# Altium PCB wch554g.PcbDoc
Units mm, origin at the board's own origin, x right, y up, seen from the top; angles counter-clockwise.
Board outline 17.6 x 16 mm, 2 copper layers (Top Layer, Bottom Layer), stack 0.75 mm thick; 18 components, 15 nets, 55 pads, 10 vias.
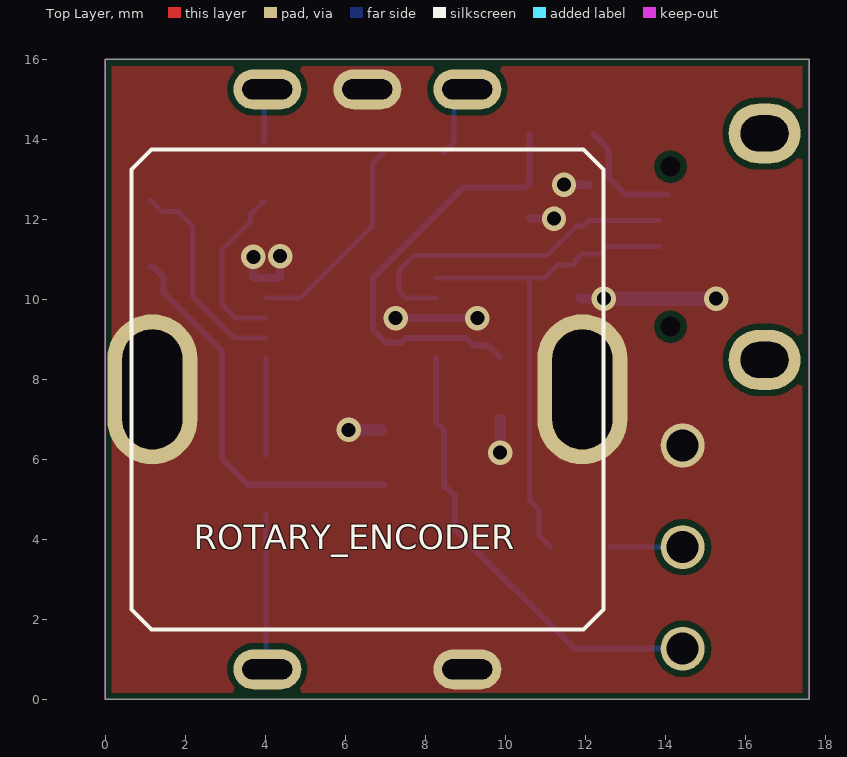
[diagram p0: Top Layer view]
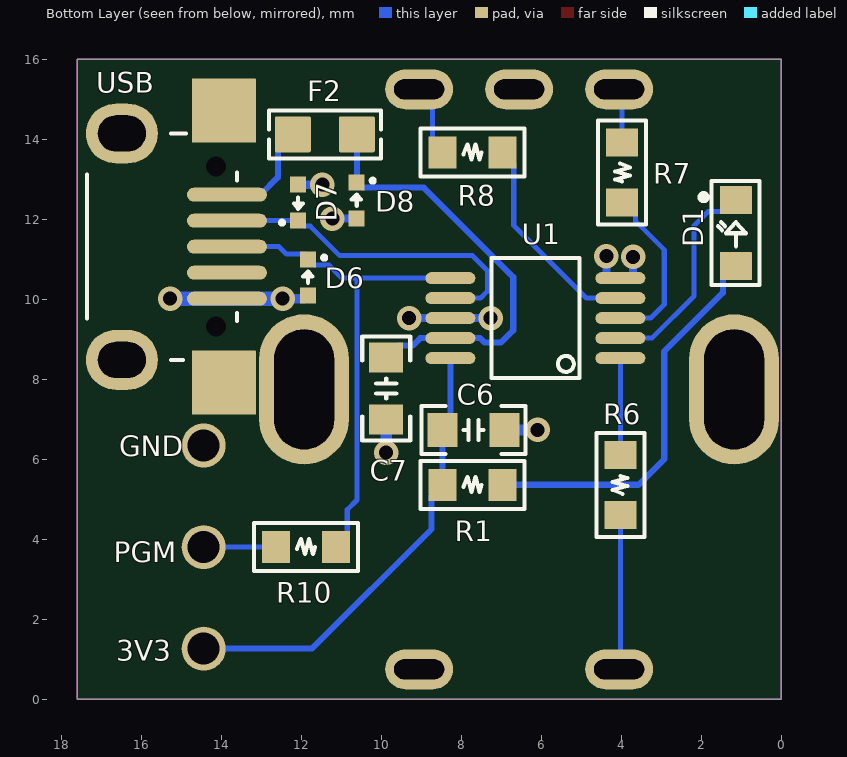
[diagram p1: Bottom Layer view, seen from below]
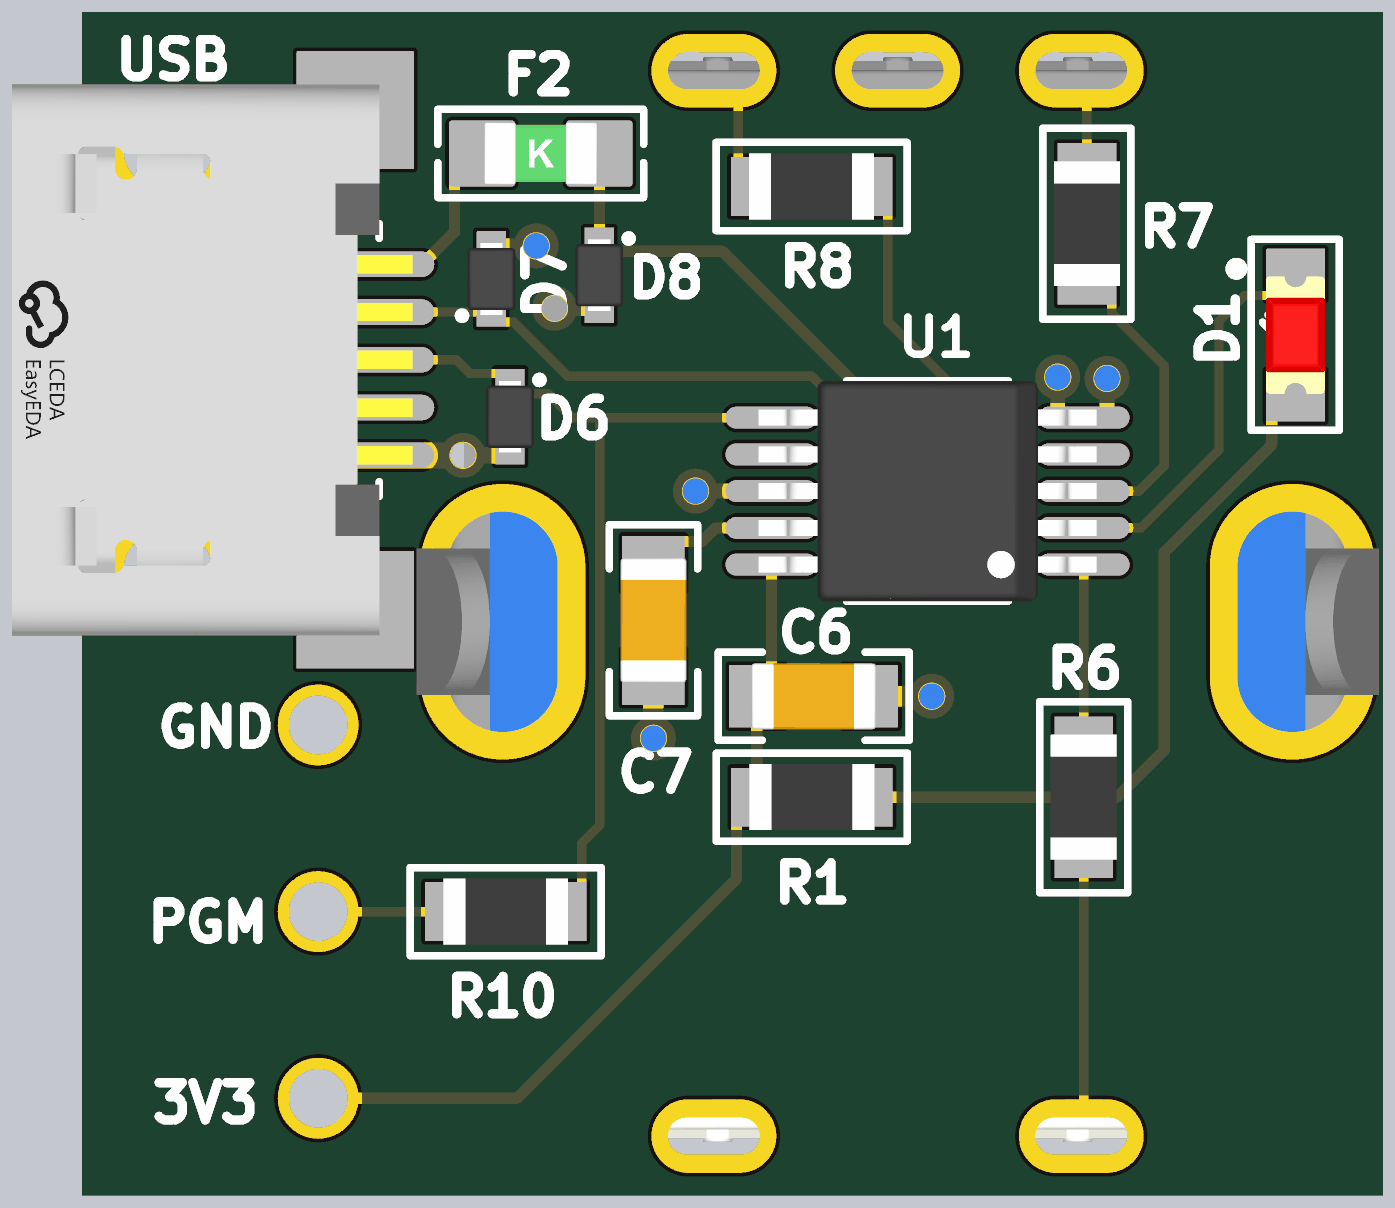
[diagram p2: 3D render of the assembled board from below, using the file's embedded part models]

## Layer stack, top to bottom
Top Solder: solder mask 0.0254, SM-001, Dk 4
Top Layer: signal copper 0.035
Dielectric 1: core 0.68, Core-043, Dk 4.3
Bottom Layer: signal copper 0.035
Bottom Solder: solder mask 0.0254, SM-001, Dk 4

## Board outline
17.6,0 0,0 0,16 17.6,16

## Design rules (kind name [scope] priority, off if disabled: settings)
BoardOutlineClearance [(OnLayer('Top Layer') AND OnLayer('Bottom Layer'))] p1: gap=0.005 ignorepadtopadclearanceinfootprint=FALSE
Clearance [All] p1: gap=0.152 ignorepadtopadclearanceinfootprint=FALSE
ComponentClearance [All] p1: gap=0 collisioncheckmode=3 verticalgap=0.254 showdistances=FALSE
DiffPairsRouting [All] p1: maxlimit=0.254 minlimit=0.102 mostfreqgap=0.254 toplayer_minwidth=0.102 toplayer_maxwidth=0.762 toplayer_prefwidth=0.102 bottomlayer_minwidth=0.102 bottomlayer_maxwidth=0.762 bottomlayer_prefwidth=0.102 maxuncoupledlength=25.4
Height [All] p1: minheight=0 maxheight=100 prefheight=12.7
HoleSize [All] p1: absolutevalues=TRUE maxlimit=10 minlimit=0.3 maxpercent=80.000 minpercent=20.000
MinimumSolderMaskSliver [All] p1: minsoldermaskwidth=0.099
PolygonConnect PolygonConnect_GND [(InNet('GND')) AND (IsVia OR (AsMM(PadXSize_AllLayers) >= 1) OR (AsMM(PadYSize_AllLayers) >= 1))] p1: connectstyle=Direct reliefconductorwidth=0.254 reliefentries=4 polygonreliefangle="90 Angle" airgapwidth=0.254
PolygonConnect [All] p2: connectstyle=Relief reliefconductorwidth=0.152 reliefentries=4 polygonreliefangle="90 Angle" airgapwidth=0.152
RoutingVias [All] p1: holewidth=0.711 width=1.27 viastyle="Through Hole" minholewidth=0.711 minwidth=1.27 maxholewidth=0.711 maxwidth=1.27 useviatemplates=TRUE viatemplateguid#1={36E6A619-BCA5-4D4E-B353-D9B316F3DFD6} viatemplatename#1=GND_VIA
SilkToSilkClearance [All] p1: silktosilkclearance=0
SilkToSolderMaskClearance [False vs False] p1: minsilkscreentomaskgap=0.254 clearancetoexposedcopper=TRUE
SolderMaskExpansion [All] p1: expansion=0.05 istentingtop=FALSE
Width [All] p1: maxlimit=0.762 minlimit=0.102 preferedwidth=0.127 minimp=50.000000 maximp=50.000000 favimp=50.000000
23 further rules are at their usual default settings.

## Classes and differential pairs
differential pair USB_D: +USB_D_P -USB_D_N

## Components (designator, comment, footprint, x,y, rotation, side; value= is the part's Value field where it differs from the comment)
3V3 "CON2" CON2 14.44,1.27 r270 bottom
C6 "1uF" MLCC_0603 7.696,6.741 r0 bottom
C7 "1uF" MLCC_0603 9.876,7.775 r90 bottom
D1 "20mA" SMT_LED_0603 1.143,11.659 r270 bottom
D6 "TVS_DIODE" TVS_DIODE 11.828,10.546 r270 bottom
D7 "TVS_DIODE" TVS_DIODE 12.082,12.42 r90 bottom
D8 "TVS_DIODE" TVS_DIODE 10.614,12.471 r270 bottom
F2 "1A" "FUSE 0603" 11.411,14.129 r180 bottom
GND "CON2" CON2 14.44,6.35 r90 bottom
PGM "CON2" CON2 14.44,3.81 r90 bottom
R1 "680r" SMT_RES_0603 7.721,5.368 r180 bottom
R6 "220r" SMT_RES_0603 4.021,5.368 r90 bottom
R7 "220r" SMT_RES_0603 3.978,13.171 r270 bottom
R8 "220r" SMT_RES_0603 7.725,13.679 r180 bottom
R10 "10k" SMT_RES_0603 11.887,3.81 r180 bottom
ROTARY_ENCODER "ROTARY_ENCODER" ENCODER 6.554,7.755 r180 top
U1 "CH554E" MSOP10 6.146,9.533 r90 bottom
USB "USB Micro" "USB MICRO B" 15.16,11.32 r270 bottom

## Footprints (in the part's own frame and the unit in brackets; to place one, negate y for a bottom-side part, rotate by r counter-clockwise, add the part's x,y. Pads: shape width x height; smd on the part's side, far side on the other; paste and mask are expansions set on the pad)
CON2 [mm] "Debug header"
  rrect100% 1.1x1.1 hole 0.8: 1(0,0)
ENCODER [mm] "Rotary encoder"
  oval 1.7x1 hole 0.5 slot 1.25 at 0 deg: 1(-2.5,-7.5) 2(0,-7.5) 3(2.5,-7.5) 4(-2.5,7) 5(2.5,7)
  rrect100% 2.25x3.75 hole 1.5 slot 3 at 90 deg: 2(-5.375,0)
  oval 2.25x3.75 hole 1.5 slot 3 at 90 deg: 2(5.375,0)
  silkscreen extent -5.9,-6 5.9,6, body extent -6.55,-7.68 6.55,7.08, height 21.18
"FUSE 0603" [mm] "Chip Fuse 1A"
  rrect10% 0.9x0.9 smd: 1(-0.8,0) 2(0.8,0)
  silkscreen extent -1.4,-0.6 1.4,0.6, body extent -0.77,-0.42 0.77,0.43, height 0.58
MLCC_0603 [mm] "MLCC 0603"
  rrect1% 0.75x0.85 smd: 1(-0.775,0) 2(0.775,0)
  silkscreen extent -1.3,-0.6 1.3,0.6, body extent -0.85,-0.45 0.85,0.45, height 0.7
MSOP10 [mm] "MSOP10 3x3 x 0.5"
  oval 0.3x1.25 smd: 1(-1,-2.125) 2(-0.5,-2.125) 3(0,-2.125) 4(0.5,-2.125) 5(1,-2.125) 6(1,2.125) 7(0.5,2.125) 8(0,2.125) 9(-0.5,2.125) 10(-1,2.125)
  silkscreen extent -1.5,-1.1 1.5,1.1, body extent -1.5,-2.3 1.5,2.3, height 1
SMT_LED_0603 [mm] "SMT LED 0603"
  rrect1% 0.7x0.8 smd: 1(-0.823,0.005) 2(0.827,0.005)
  silkscreen extent -1.3,-0.85 1.3,0.6, body extent -0.8,-0.39 0.8,0.41, height 0.8
SMT_RES_0603 [mm] "0603 SMT Resistor"
  rrect1% 0.7x0.8 smd: 1(-0.75,0) 2(0.75,0)
  silkscreen extent -1.3,-0.6 1.3,0.6, body extent -0.85,-0.45 0.85,0.45, height 0.5
TVS_DIODE [mm] "SODFL 98x40 2 pin"
  rrect1% 0.4x0.4 smd: 1(-0.45,0) 2(0.45,0)
  silkscreen extent -0.55,-0.13 0.13,0.45, body extent -0.49,-0.33 0.49,0.33, height 0.4
"USB MICRO B" [mm] "USB Micro B Receptacle"
  rrect100% 0.35x2 smd: 1(-1.3,1.3) 2(-0.65,1.3) 3(0,1.3) 4(0.65,1.3) 5(1.3,1.3)
  oval 0x0.5 hole 0.5 unplated paste-2539.97 mask+0: B(-2,1.025) B(2,1.025)
  rrect1% 1.6x1.6 smd: S(-3.4,1.225) S(3.4,1.225)
  oval 1.5x1.8 hole 0.9 slot 1.2 at 90 deg: S(-2.83,-1.325) S(2.83,-1.325)
  silkscreen extent -2.83,-2.2 2.83,1.55, body extent -3.75,-3.45 3.75,2, height 2.65

## Part data
C6 C7: library part CAP_CERAMIC, "MLCC", JLCPCB Part #=C29936
D1: library part LED, "LED", JLCPCB Part #=C205445
D6 D7 D8: "TVS Diode", JLCPCB Part #=C151980
F2: library part FUSE, "Resettable fuse", JLCPCB Part #=C210357
R1: library part RESISTOR, "Resistor", JLCPCB Part #=C23228
R6 R7 R8: library part RESISTOR, "Resistor", JLCPCB Part #=C27592
R10: library part RESISTOR, "Resistor", JLCPCB Part #=C25804
ROTARY_ENCODER: "Rotary Encoder"
U1: JLCPCB Part #=C111293
USB: library part USB_SOCKET, "USB Receptacle", JLCPCB Part #=C397452

## Via types
v1: diameter 0.61, hole 0.35, Top Layer to Bottom Layer, tented both sides, 10 vias

## Nets (pads, with @x,y where several pads share a name; then routed paths per layer and width w, separated by ;. In a path a pad name is that pad's centre, name@x,y a point inside that pad or via, vN(x,y) a via of type N, cw(c..) or ccw(c..) an arc to the next point about the centre after c; other vN are vias at no path point)
3v3: 3V3.1 C6.2 R1.1 U1.10 | length 11.5
  Bottom Layer w0.152: U1.10 8.271,6.891 8.321,6.891 C6.2 R1.1@8.471,5.318 ; R1.1 8.745,5.094 8.745,4.26 11.735,1.27 3V3.1
BUTTON: R6.2 U1.1 | length 2.4
  Bottom Layer w0.127: R6.2 U1.1
CHA: R8.2 U1.4 | length 5.4
  Bottom Layer w0.127: U1.4 4.872,10.033 6.688,11.85 6.688,13.392 R8.2
CHB: R7.2 U1.3 | length 4.2
  Bottom Layer w0.127: R7.2 3.928,12.421 3.641,12.135 3.641,11.958 2.925,11.242 2.925,9.875 3.268,9.533 U1.3
GND: C6.1 C7.1 D6.2 D7.2 D8.2 GND.1 ROTARY_ENCODER.2 ROTARY_ENCODER.4 U1.5 U1.8 USB.5 | length 10.1
  Bottom Layer w0.203: v1(3.704,11.067) 3.704,10.578 3.749,10.533 4.33,10.533 4.374,10.578 v1(4.374,11.085) ; v1(7.265,9.533) v1(9.305,9.533) ; D8.2 v1(11.222,12.021) ; v1(11.472,12.87) D7.2
  Bottom Layer w0.229: D6.2@11.867,10.058 11.905,10.02 v1(12.468,10.02)
  Bottom Layer w0.279: v1(6.089,6.741) C6.1 ; v1(9.876,6.169) C7.1
  Bottom Layer w0.356: v1(12.468,10.02) v1(15.277,10.02)
LED_A: D1.2 R1.2 | length 9.9
  Bottom Layer w0.152: D1.2 1.188,10.832 1.462,10.558 1.462,10.169 2.925,8.705 2.925,6.009 3.567,5.368 R1.2
LED_C: D1.1 U1.2 | length 5.3
  Bottom Layer w0.127: D1.1 1.424,12.195 1.832,12.195 2.179,11.848 2.179,10.09 3.236,9.033 U1.2
PGM: PGM.1 R10.1 | length 1.8
  Bottom Layer w0.127: R10.1 PGM.1
RTA: R8.1 ROTARY_ENCODER.1 | length 1.8
  Bottom Layer w0.127: R8.1 8.721,13.925 8.721,14.922 ROTARY_ENCODER.1
RTB: R7.1 ROTARY_ENCODER.3 | length 1.4
  Bottom Layer w0.127: R7.1 3.978,15.179 ROTARY_ENCODER.3
SWB: R6.1 ROTARY_ENCODER.5 | length 3.9
  Bottom Layer w0.127: R6.1 4.021,0.788 ROTARY_ENCODER.5
USB_D_N: D7.1 U1.7 USB.2 | length 8.5
  Bottom Layer w0.127: U1.7 7.522,10.033 7.349,10.207 7.349,10.725 7.718,11.095 11.036,11.095 11.775,11.834 11.946,11.834 D7.1 USB.2
USB_D_P: D6.1 R10.2 U1.6 USB.3 | length 12.9
  Bottom Layer w0.127: U1.6 10.606,10.533 ; R10.2 10.851,4.097 10.851,4.744 10.606,4.989 10.606,10.533 ; D6.1@11.772,10.996 11.909,11.133 12.37,11.133 12.557,11.32 USB.3 ; D6.1 11.692,10.86 11.311,10.86 10.985,10.533 10.606,10.533
VIN: F2.1 USB.1 | length 2.9
  Bottom Layer w0.152: F2.1 12.584,13.756 12.584,13.055 13.02,12.62 USB.1@14.063,12.62
VUSB: C7.2 D8.1 F2.2 U1.9 | length 11
  Bottom Layer w0.152: C7.2 9.578,8.849 9.215,8.849 9.031,9.033 U1.9 7.529,9.033 7.422,8.926 7.004,8.926 6.702,9.229 6.702,10.559 8.94,12.797 10.491,12.797 D8.1 10.611,12.924 F2.2
pads on no net: USB.4 USB.B USB.S

## Polygon pours and split planes (outlines as drawn)
GND on Top Layer "GND_BOTTOM" (solid, pour order 1): 0,16 17.6,16 17.6,0 0,0

## Keep-outs
Keep-Out Layer:
  the board outline again, w0.025

## Silkscreen, mask and mechanical layers (free items; w line width, h text height)
Board:
  the board outline again, w0.102